# EAGLE board prototype (EAGLE 6.5.0)
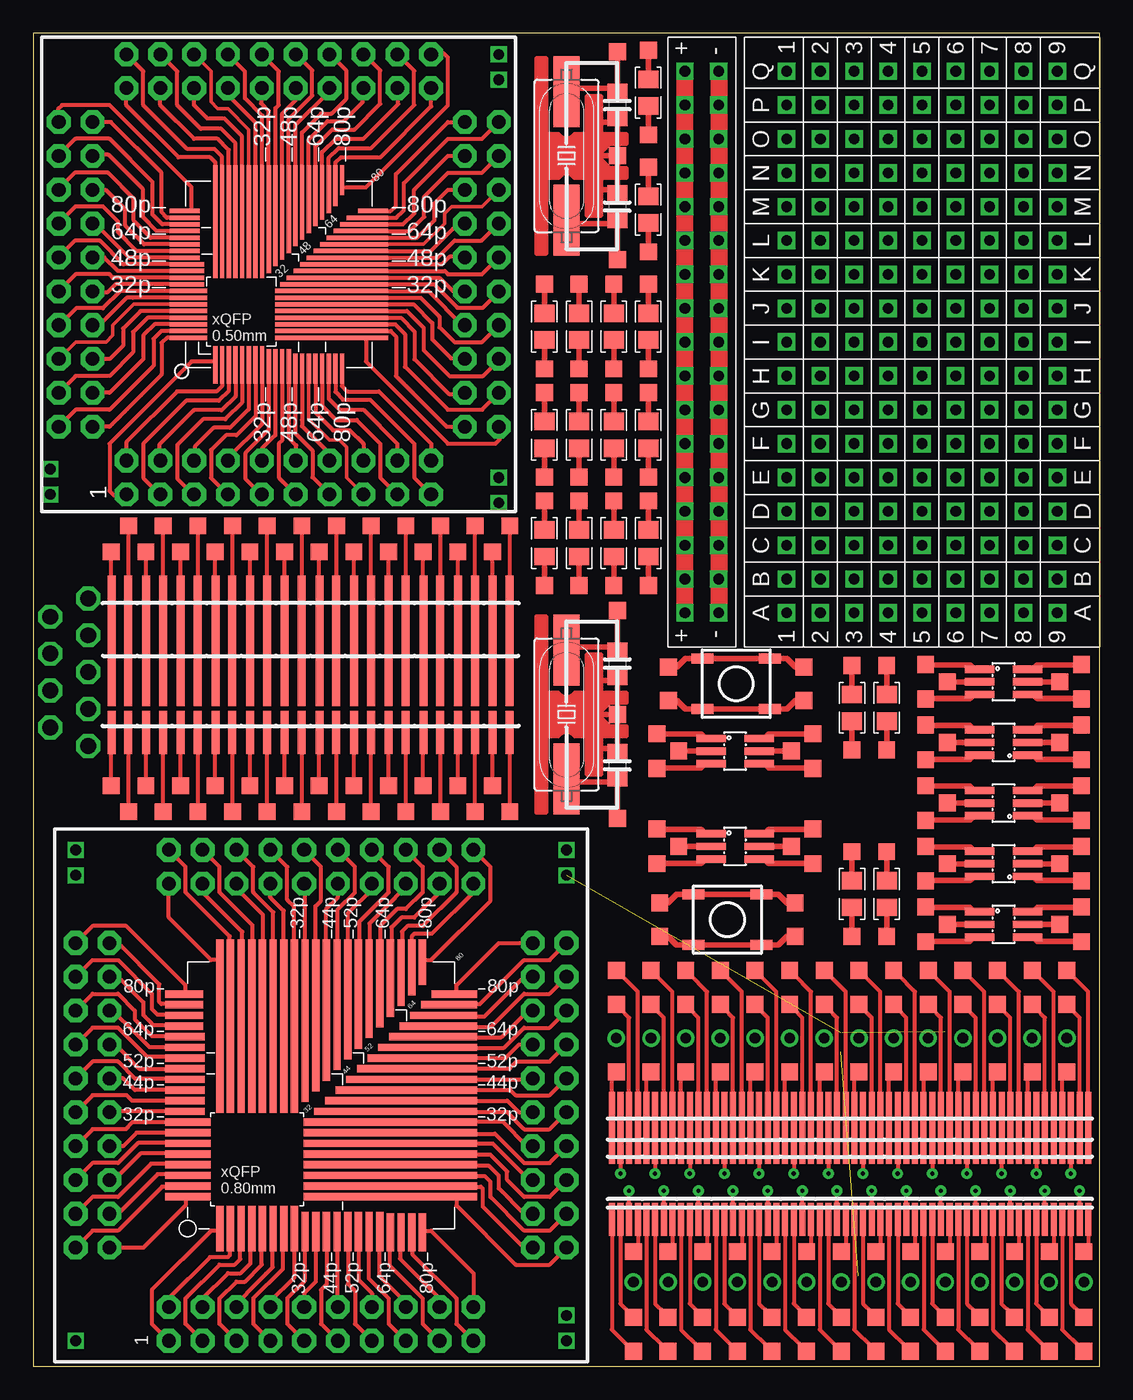
[diagram p0: board, top side]
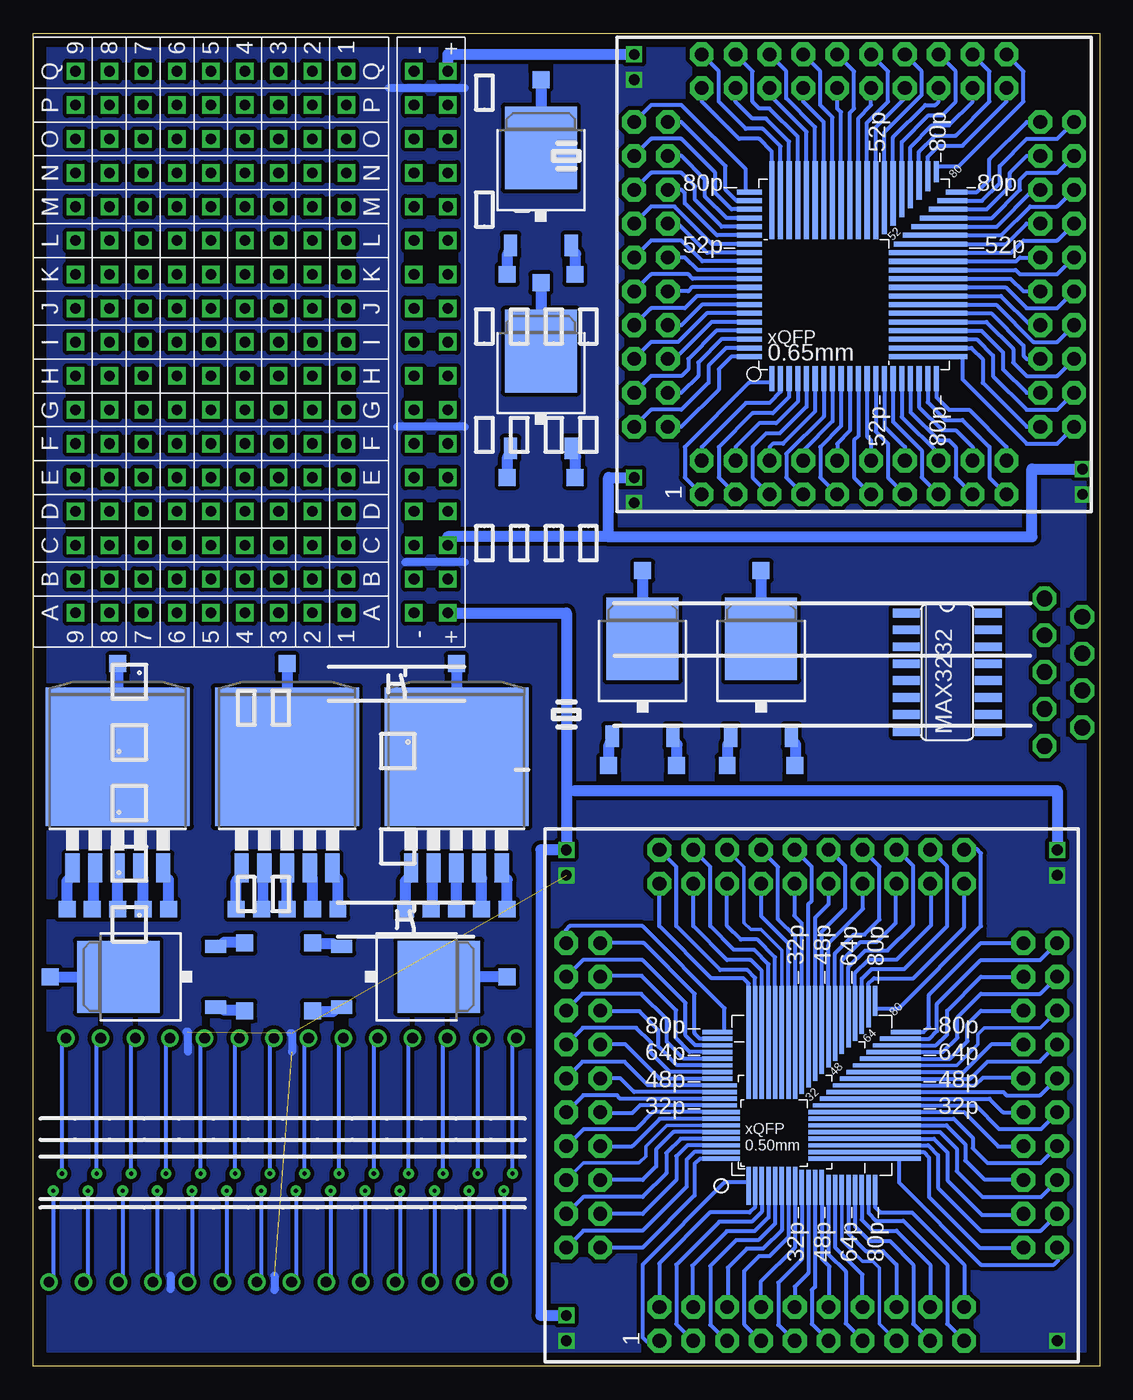
[diagram p1: board, bottom side, seen from below]

Size 80 x 100 mm. Coordinates in mm from the lower left corner, seen from the top.
Outline: 0,0 80,0 80,100 0,100 0,0
Copper layers (1*16): Top 0.035mm / dielectric 1.5mm / Bottom 0.035mm
Design rules "default *": minimum track width 0.2mm, minimum drill 0.4mm, track to track 8mil, track to pad 8mil, pad to pad 8mil, via to via 8mil, smd to smd 8mil, copper to edge 40mil, drill to drill 8mil, minimum pad ring 10mil, minimum via ring 4mil, stop-mask expansion 4mil, vias tented up to drill 0mil, thermal gap 10mil

## Footprints (pad centres in the part's own frame; a part is rotated, then mirrored left to right if it is on the bottom)
BB_TSSOP_0650 = smd 2.45 x 0.45: P$1 -3.425,0; P$2 -3.425,-0.65; P$7 -3.425,0.65; P$8 -3.425,1.3 | smd 5.4 x 0.45: P$3 3.425,1.3; P$4 3.425,-0.65; P$5 3.425,0; P$6 3.425,0.65 | smd 1.27 x 1.27: P$9 -13.335,-0.318; P$10 -10.795,-0.318; P$11 -5.85,-0.325; P$12 7.62,0.953; P$13 12.7,0.953; P$14 15.24,0.953 | drill 0.8: P$21 -8.125,-0.325; P$28 10.16,0.953 | drill 0.305: P$25 -1.285,0; P$26 0,0.65
BB_QFP_080_050_BREAKOUT_BOARD = smd 0.55 x 3.405: 1 -7.6,-9.998; 2 -6.8,-9.998; 3 -6,-9.998; 4 -5.2,-9.998; 5 -4.4,-9.998; 6 -3.6,-9.998; 7 -2.8,-9.998; 8 -2,-9.998; 41 7.6,9.997 | smd 0.55 x 2.95: 9 -1.2,-10.225; 10 -0.4,-10.225; 11 0.4,-10.225; 12 1.2,-10.225; 13 2,-10.225; 14 2.8,-10.225; 15 3.6,-10.225; 16 4.4,-10.225 | smd 0.55 x 2.85: 17 5.2,-10.275; 18 6,-10.275; 19 6.8,-10.275; 20 7.6,-10.275 | smd 13.005 x 0.55: 21 5.197,-7.6; 22 5.197,-6.8; 23 5.197,-6; 24 5.197,-5.2; 25 5.197,-4.4; 26 5.197,-3.6; 27 5.197,-2.8; 28 5.197,-2 | smd 12.205 x 0.55: 29 5.597,-1.2 | smd 11.405 x 0.55: 30 5.997,-0.4 | smd 10.605 x 0.55: 31 6.397,0.4 | smd 9.805 x 0.55: 32 6.797,1.2 | smd 9.005 x 0.55: 33 7.197,2 | smd 8.205 x 0.55: 34 7.597,2.8 | smd 7.405 x 0.55: 35 7.997,3.6 | smd 6.605 x 0.55: 36 8.397,4.4 | smd 5.805 x 0.55: 37 8.797,5.2 | smd 5.005 x 0.55: 38 9.197,6 | smd 4.205 x 0.55: 39 9.597,6.8 | smd 3.405 x 0.55: 40 9.997,7.6; 73 -9.998,-2; 74 -9.998,-2.8; 75 -9.998,-3.6; 76 -9.998,-4.4; 77 -9.998,-5.2; 78 -9.998,-6; 79 -9.998,-6.8; 80 -9.998,-7.6 | smd 0.55 x 4.205: 42 6.8,9.597 | smd 0.55 x 5.005: 43 6,9.197 | smd 0.55 x 5.805: 44 5.2,8.797 | smd 0.55 x 6.605: 45 4.4,8.397 | smd 0.55 x 7.405: 46 3.6,7.997 | smd 0.55 x 8.205: 47 2.8,7.597 | smd 0.55 x 9.005: 48 2,7.197 | smd 0.55 x 9.805: 49 1.2,6.797 | smd 0.55 x 10.605: 50 0.4,6.397 | smd 0.55 x 11.405: 51 -0.4,5.997 | smd 0.55 x 12.205: 52 -1.2,5.597 | smd 0.55 x 13.005: 53 -2,5.198; 54 -2.8,5.198; 55 -3.6,5.198; 56 -4.4,5.198; 57 -5.2,5.198; 58 -6,5.198; 59 -6.8,5.198; 60 -7.6,5.198 | smd 2.85 x 0.55: 61 -10.275,7.6; 62 -10.275,6.8; 63 -10.275,6; 64 -10.275,5.2 | smd 2.95 x 0.55: 65 -10.225,4.4; 66 -10.225,3.6; 67 -10.225,2.8; 68 -10.225,2; 69 -10.225,1.2; 70 -10.225,0.4; 71 -10.225,-0.4; 72 -10.225,-1.2 | smd 2.824 x 0.33 bottom: 81 6.788,-1.25; 82 6.788,-1.75; 83 6.788,-2.25; 84 6.788,-2.75; 85 6.788,-3.25; 86 6.788,-3.75; 87 6.788,-4.25; 88 6.788,-4.75 | smd 2.6 x 0.33 bottom: 89 6.9,-0.75; 90 6.9,-0.25; 91 6.9,0.25; 92 6.9,0.75 | smd 2.25 x 0.33 bottom: 93 7.075,1.25; 94 7.075,1.75; 95 7.075,2.75; 96 7.075,2.25; 117 7.075,3.25; 118 7.075,3.75; 119 7.075,4.25; 120 7.075,4.75; 160 -7.075,4.75 | smd 0.33 x 2.824 bottom: 97 4.75,-6.788; 98 4.25,-6.788; 99 3.75,-6.788; 100 3.25,-6.788; 101 2.75,-6.788; 102 2.25,-6.788; 103 1.75,-6.788; 104 1.25,-6.788 | smd 0.33 x 2.6 bottom: 105 0.75,-6.9; 106 0.25,-6.9; 107 -0.25,-6.9; 108 -0.75,-6.9 | smd 0.33 x 2.25 bottom: 109 -1.25,-7.075; 110 -1.75,-7.075; 111 -2.25,-7.075; 112 -2.75,-7.075; 113 -3.25,-7.075; 114 -3.75,-7.075; 115 -4.25,-7.075; 116 -4.75,-7.075; 159 -4.75,7.075 | smd 8.47 x 0.33 bottom: 121 -3.965,-4.75; 122 -3.965,-4.25; 123 -3.965,-3.75; 124 -3.965,-3.25; 125 -3.965,-2.75; 126 -3.965,-2.25; 127 -3.965,-1.75; 128 -3.965,-1.25 | smd 0.33 x 8.47 bottom: 129 4.75,3.965; 130 4.25,3.965; 131 3.75,3.965; 132 3.25,3.965; 133 2.75,3.965; 134 2.25,3.965; 135 1.75,3.965; 136 1.25,3.965 | smd 8.1 x 0.33 bottom: 137 -4.15,-0.75 | smd 0.33 x 8.1 bottom: 138 0.75,4.15 | smd 7.6 x 0.33 bottom: 139 -4.4,-0.25 | smd 0.33 x 7.6 bottom: 140 0.25,4.4 | smd 7.1 x 0.33 bottom: 141 -4.65,0.25 | smd 0.33 x 7.1 bottom: 142 -0.25,4.65 | smd 6.6 x 0.33 bottom: 143 -4.9,0.75 | smd 0.33 x 6.6 bottom: 144 -0.75,4.9 | smd 6.1 x 0.33 bottom: 145 -5.15,1.25 | smd 0.33 x 6.1 bottom: 146 -1.25,5.15 | smd 5.6 x 0.33 bottom: 147 -5.4,1.75 | smd 0.33 x 5.6 bottom: 148 -1.75,5.4 | smd 5.1 x 0.33 bottom: 149 -5.65,2.25 | smd 0.33 x 5.1 bottom: 150 -2.25,5.65 | smd 4.6 x 0.33 bottom: 151 -5.9,2.75 | smd 0.33 x 4.6 bottom: 152 -2.75,5.9 | smd 4.1 x 0.33 bottom: 153 -6.15,3.25 | smd 0.33 x 4.1 bottom: 154 -3.25,6.15 | smd 3.6 x 0.33 bottom: 155 -6.4,3.75 | smd 0.33 x 3.6 bottom: 156 -3.75,6.4 | smd 0.33 x 3.1 bottom: 157 -4.25,6.65 | smd 3.1 x 0.33 bottom: 158 -6.65,4.25 | drill 1.016 pad 1.778 octagon: P$1 -11.43,-18.415; P$2 -11.43,-15.875; P$3 -8.89,-18.415; P$4 -8.89,-15.875; P$5 -6.35,-18.415; P$6 -6.35,-15.875; P$7 -3.81,-18.415; P$8 -3.81,-15.875; P$9 -1.27,-18.415; P$10 -1.27,-15.875; P$11 1.27,-18.415; P$12 1.27,-15.875; P$13 3.81,-18.415; P$14 3.81,-15.875; P$15 6.35,-18.415; P$16 6.35,-15.875; P$17 8.89,-18.415; P$18 8.89,-15.875; P$19 11.43,-18.415; P$20 11.43,-15.875; P$21 18.415,-11.43; P$22 15.875,-11.43; P$23 18.415,-8.89; P$24 15.875,-8.89; P$25 18.415,-6.35; P$26 15.875,-6.35; P$27 18.415,-3.81; P$28 15.875,-3.81; P$29 18.415,-1.27; P$30 15.875,-1.27; P$31 18.415,1.27; P$32 15.875,1.27; P$33 18.415,3.81; P$34 15.875,3.81; P$35 18.415,6.35; P$36 15.875,6.35; P$37 18.415,8.89; P$38 15.875,8.89; P$39 18.415,11.43; P$40 15.875,11.43; P$41 11.43,18.415; P$42 11.43,15.875; P$43 8.89,18.415; P$44 8.89,15.875; P$45 6.35,18.415; P$46 6.35,15.875; P$47 3.81,18.415; P$48 3.81,15.875; P$49 1.27,18.415; P$50 1.27,15.875; P$51 -1.27,18.415; P$52 -1.27,15.875; P$53 -3.81,18.415; P$54 -3.81,15.875; P$55 -6.35,18.415; P$56 -6.35,15.875; P$57 -8.89,18.415; P$58 -8.89,15.875; P$59 -11.43,18.415; P$60 -11.43,15.875; P$61 -18.415,11.43; P$62 -15.875,11.43; P$63 -18.415,8.89; P$64 -15.875,8.89; P$65 -18.415,6.35; P$66 -15.875,6.35; P$67 -18.415,3.81; P$68 -15.875,3.81; P$69 -18.415,1.27; P$70 -15.875,1.27; P$71 -18.415,-1.27; P$72 -15.875,-1.27; P$73 -18.415,-3.81; P$74 -15.875,-3.81; P$75 -18.415,-6.35; P$76 -15.875,-6.35; P$77 -18.415,-8.89; P$78 -15.875,-8.89; P$79 -18.415,-11.43; P$80 -15.875,-11.43
BB_QFP_050_065_BREAKOUT_BOARD = smd 0.33 x 2.824: 1 -4.75,-6.788; 2 -4.25,-6.788; 3 -3.75,-6.788; 4 -3.25,-6.788; 5 -2.75,-6.788; 6 -2.25,-6.788; 7 -1.75,-6.788; 8 -1.25,-6.788 | smd 0.33 x 2.6: 9 -0.75,-6.9; 10 -0.25,-6.9; 11 0.25,-6.9; 12 0.75,-6.9 | smd 0.33 x 2.25: 13 1.25,-7.075; 14 1.75,-7.075; 15 2.25,-7.075; 16 2.75,-7.075; 17 3.25,-7.075; 18 3.75,-7.075; 19 4.25,-7.075; 20 4.75,-7.075; 41 4.75,7.075 | smd 8.47 x 0.33: 21 3.965,-4.75; 22 3.965,-4.25; 23 3.965,-3.75; 24 3.965,-3.25; 25 3.965,-2.75; 26 3.965,-2.25; 27 3.965,-1.75; 28 3.965,-1.25 | smd 8.1 x 0.33: 29 4.15,-0.75 | smd 7.6 x 0.33: 30 4.4,-0.25 | smd 7.1 x 0.33: 31 4.65,0.25 | smd 6.6 x 0.33: 32 4.9,0.75 | smd 6.1 x 0.33: 33 5.15,1.25 | smd 5.6 x 0.33: 34 5.4,1.75 | smd 5.1 x 0.33: 35 5.65,2.25 | smd 4.6 x 0.33: 36 5.9,2.75 | smd 4.1 x 0.33: 37 6.15,3.25 | smd 3.6 x 0.33: 38 6.4,3.75 | smd 3.1 x 0.33: 39 6.65,4.25 | smd 2.25 x 0.33: 40 7.075,4.75; 61 -7.075,4.75; 62 -7.075,4.25; 63 -7.075,3.75; 64 -7.075,3.25; 65 -7.075,2.75; 66 -7.075,2.25; 67 -7.075,1.75; 68 -7.075,1.25 | smd 0.33 x 3.1: 42 4.25,6.65 | smd 0.33 x 3.6: 43 3.75,6.4 | smd 0.33 x 4.1: 44 3.25,6.15 | smd 0.33 x 4.6: 45 2.75,5.9 | smd 0.33 x 5.1: 46 2.25,5.65 | smd 0.33 x 5.6: 47 1.75,5.4 | smd 0.33 x 6.1: 48 1.25,5.15 | smd 0.33 x 6.6: 49 0.75,4.9 | smd 0.33 x 7.1: 50 0.25,4.65 | smd 0.33 x 7.6: 51 -0.25,4.4 | smd 0.33 x 8.1: 52 -0.75,4.15 | smd 0.33 x 8.47: 53 -1.25,3.965; 54 -1.75,3.965; 55 -2.25,3.965; 56 -2.75,3.965; 57 -3.25,3.965; 58 -3.75,3.965; 59 -4.25,3.965; 60 -4.75,3.965 | smd 2.6 x 0.33: 69 -6.9,0.75; 70 -6.9,0.25; 71 -6.9,-0.25; 72 -6.9,-0.75 | smd 2.824 x 0.33: 73 -6.788,-1.25; 74 -6.788,-1.75; 75 -6.788,-2.25; 76 -6.788,-2.75; 77 -6.788,-3.25; 78 -6.788,-3.75; 79 -6.788,-4.25; 80 -6.788,-4.75 | smd 1.875 x 0.38 bottom: 81 7.838,-0.325; 82 7.838,0.325; 83 7.838,0.975; 84 7.838,1.625; 85 7.838,2.275; 86 7.838,2.925; 87 7.838,3.575; 88 7.838,4.225; 89 7.838,4.875; 90 7.838,5.525; 91 7.838,6.175; 92 7.838,-0.975; 93 7.838,-1.625; 94 7.838,-2.275; 95 7.838,-2.925; 96 7.838,-3.575; 97 7.838,-4.225; 98 7.838,-4.875; 99 7.838,-5.525; 100 7.838,-6.175 | smd 0.38 x 1.875 bottom: 101 6.175,-7.838; 102 5.525,-7.838; 103 4.875,-7.838; 104 4.225,-7.838; 105 3.575,-7.838; 106 2.925,-7.838; 107 2.275,-7.838; 108 1.625,-7.838; 109 0.975,-7.838; 110 0.325,-7.838; 111 -0.325,-7.838; 112 -0.975,-7.838; 113 -1.625,-7.838; 114 -2.275,-7.838; 115 -2.925,-7.838; 116 -3.575,-7.838; 117 -4.225,-7.838; 118 -4.875,-7.838; 119 -5.525,-7.838; 120 -6.175,-7.838 | smd 1.6 x 0.38 bottom: 121 -7.7,6.175 | smd 0.38 x 1.6 bottom: 122 -6.175,7.7 | smd 0.38 x 2.25 bottom: 123 -5.525,7.375 | smd 0.38 x 5.875 bottom: 124 1.625,5.563; 125 0.975,5.563; 126 0.325,5.563; 127 -0.325,5.563; 128 -0.975,5.563; 129 -1.625,5.563; 135 2.275,5.563; 136 2.925,5.563; 137 3.575,5.563; 138 4.225,5.563; 139 4.875,5.563; 140 5.525,5.563; 141 6.175,5.563 | smd 0.38 x 5.5 bottom: 130 -2.275,5.75 | smd 0.38 x 4.85 bottom: 131 -2.925,6.075 | smd 0.38 x 4.2 bottom: 132 -3.575,6.4 | smd 0.38 x 3.55 bottom: 133 -4.225,6.725 | smd 0.38 x 2.9 bottom: 134 -4.875,7.05 | smd 5.875 x 0.38 bottom: 142 -5.563,-6.175; 143 -5.563,-5.525; 144 -5.563,-4.875; 145 -5.563,-4.225; 146 -5.563,-3.575; 147 -5.563,-2.925; 148 -5.563,-2.275; 149 -5.563,-1.625; 156 -5.563,1.625; 157 -5.563,0.975; 158 -5.563,0.325; 159 -5.563,-0.325; 160 -5.563,-0.975 | smd 2.25 x 0.38 bottom: 150 -7.375,5.525 | smd 2.9 x 0.38 bottom: 151 -7.05,4.875 | smd 3.55 x 0.38 bottom: 152 -6.725,4.225 | smd 4.2 x 0.38 bottom: 153 -6.4,3.575 | smd 4.85 x 0.38 bottom: 154 -6.075,2.925 | smd 5.5 x 0.38 bottom: 155 -5.75,2.275 | drill 1.016 pad 1.778 octagon: P$1 -11.43,-16.51; P$2 -11.43,-13.97; P$3 -8.89,-16.51; P$4 -8.89,-13.97; P$5 -6.35,-16.51; P$6 -6.35,-13.97; P$7 -3.81,-16.51; P$8 -3.81,-13.97; P$9 -1.27,-16.51; P$10 -1.27,-13.97; P$11 1.27,-16.51; P$12 1.27,-13.97; P$13 3.81,-16.51; P$14 3.81,-13.97; P$15 6.35,-16.51; P$16 6.35,-13.97; P$17 8.89,-16.51; P$18 8.89,-13.97; P$19 11.43,-16.51; P$20 11.43,-13.97; P$21 16.51,-11.43; P$22 13.97,-11.43; P$23 16.51,-8.89; P$24 13.97,-8.89; P$25 16.51,-6.35; P$26 13.97,-6.35; P$27 16.51,-3.81; P$28 13.97,-3.81; P$29 16.51,-1.27; P$30 13.97,-1.27; P$31 16.51,1.27; P$32 13.97,1.27; P$33 16.51,3.81; P$34 13.97,3.81; P$35 16.51,6.35; P$36 13.97,6.35; P$37 16.51,8.89; P$38 13.97,8.89; P$39 16.51,11.43; P$40 13.97,11.43; P$41 11.43,16.51; P$42 11.43,13.97; P$43 8.89,16.51; P$44 8.89,13.97; P$45 6.35,16.51; P$46 6.35,13.97; P$47 3.81,16.51; P$48 3.81,13.97; P$49 1.27,16.51; P$50 1.27,13.97; P$51 -1.27,16.51; P$52 -1.27,13.97; P$53 -3.81,16.51; P$54 -3.81,13.97; P$55 -6.35,16.51; P$56 -6.35,13.97; P$57 -8.89,16.51; P$58 -8.89,13.97; P$59 -11.43,16.51; P$60 -11.43,13.97; P$61 -16.51,11.43; P$62 -13.97,11.43; P$63 -16.51,8.89; P$64 -13.97,8.89; P$65 -16.51,6.35; P$66 -13.97,6.35; P$67 -16.51,3.81; P$68 -13.97,3.81; P$69 -16.51,1.27; P$70 -13.97,1.27; P$71 -16.51,-1.27; P$72 -13.97,-1.27; P$73 -16.51,-3.81; P$74 -13.97,-3.81; P$75 -16.51,-6.35; P$76 -13.97,-6.35; P$77 -16.51,-8.89; P$78 -13.97,-8.89; P$79 -16.51,-11.43; P$80 -13.97,-11.43
BB_SOIC = smd 3.2 x 0.6: P$1 -5.11,0.635; P$2 -5.11,-0.635 | smd 9.8 x 0.6: P$3 1.77,-0.635; P$4 1.77,0.635 | smd 1.27 x 1.27: P$5 -9.1,0.65; P$6 -11.05,-0.65; P$7 8.45,0.65; P$8 10.4,-0.65
BB_SOT23-6 = smd 0.55 x 2.2: 1 -0.95,-1.8; 2 0,-1.8; 3 0.95,-1.8; 4 0.95,1.8; 5 0,1.8; 6 -0.95,1.8 | smd 1.27 x 1.27: P$1 -1.3,5.85; P$2 1.3,5.85; P$3 0,4.225; P$4 0,-4.225; P$5 -1.3,-5.85; P$6 1.3,-5.85
BB_XTAL = smd 5.334 x 1.93: 1 -4.826,-2.54; 2 4.826,-2.54 | smd 1.3 x 1.5: 3 -4.76,1.27; 4 -2.86,1.27; 5 2.86,1.27; 6 4.76,1.27 | smd 1.27 x 1.27: P$1 -7.8,1.3; P$2 7.8,1.3; P$3 0,1.3
PROTO_THROUGH = drill 0.8 square: P$1 12.7,0; P$2 10.16,0; P$3 7.62,0; P$4 5.08,0; P$5 15.24,0; P$6 17.78,0; P$7 20.32,0; P$8 2.54,0; P$9 -2.54,0; P$10 0,0; P$11 0,-2.54; P$12 0,-5.08; P$13 0,-7.62; P$14 0,-10.16; P$15 0,2.54; P$16 0,5.08; P$17 0,7.62; P$18 0,10.16; P$19 2.54,10.16; P$20 5.08,10.16; P$21 7.62,10.16; P$22 10.16,10.16; P$23 12.7,10.16; P$24 15.24,10.16; P$25 17.78,10.16; P$26 20.32,10.16; P$27 -5.08,0; P$28 -7.62,0; P$29 -10.16,0; P$30 -10.16,-2.54; P$31 -10.16,-5.08; P$32 -10.16,-7.62; P$33 2.54,-10.16; P$34 5.08,-10.16; P$35 7.62,-10.16; P$36 10.16,-10.16; P$37 12.7,-10.16; P$38 15.24,-10.16; P$39 17.78,-10.16; P$40 20.32,-10.16; P$41 -10.16,-10.16; P$42 -10.16,2.54; P$43 20.32,-7.62; P$44 20.32,-5.08; P$45 20.32,-2.54; P$46 17.78,-2.54; P$47 15.24,-2.54; P$48 12.7,-2.54; P$49 10.16,-2.54; P$50 7.62,-2.54; P$51 5.08,-2.54; P$52 2.54,-2.54; P$53 2.54,-5.08; P$54 2.54,-7.62; P$55 5.08,-7.62; P$56 5.08,-5.08; P$57 7.62,-5.08; P$58 7.62,-7.62; P$59 10.16,-7.62; P$60 10.16,-5.08; P$61 12.7,-5.08; P$62 15.24,-5.08; P$63 17.78,-5.08; P$64 17.78,-7.62; P$65 15.24,-7.62; P$66 12.7,-7.62; P$67 2.54,2.54; P$68 5.08,2.54; P$69 7.62,2.54; P$70 10.16,2.54; P$71 12.7,2.54; P$72 15.24,2.54; P$73 17.78,2.54; P$74 20.32,2.54; P$75 20.32,5.08; P$76 17.78,5.08; P$77 17.78,7.62; P$78 20.32,7.62; P$79 15.24,7.62; P$80 15.24,5.08; P$81 12.7,5.08; P$82 12.7,7.62; P$83 10.16,7.62; P$84 10.16,5.08; P$85 7.62,5.08; P$86 5.08,5.08; P$87 2.54,5.08; P$88 2.54,7.62; P$89 5.08,7.62; P$90 7.62,7.62; P$91 -10.16,5.08; P$92 -10.16,7.62; P$93 -10.16,10.16; P$94 -7.62,10.16; P$95 -5.08,10.16; P$96 -2.54,10.16; P$97 -7.62,-10.16; P$98 -5.08,-10.16; P$99 -2.54,-10.16; P$100 -2.54,-2.54; P$101 -5.08,-2.54; P$102 -7.62,-2.54; P$103 -7.62,-5.08; P$104 -7.62,-7.62; P$105 -5.08,-7.62; P$106 -5.08,-5.08; P$107 -2.54,-5.08; P$108 -2.54,-7.62; P$109 -7.62,2.54; P$110 -5.08,2.54; P$111 -2.54,2.54; P$112 -2.54,5.08; P$113 -5.08,5.08; P$114 -7.62,5.08; P$115 -7.62,7.62; P$116 -5.08,7.62; P$117 -2.54,7.62; P$118 -12.7,0; P$119 -15.24,0; P$120 -17.78,0; P$121 -20.32,0; P$122 -20.32,-2.54; P$123 -20.32,-5.08; P$124 -20.32,-7.62; P$125 -20.32,-10.16; P$126 -20.32,2.54; P$127 -20.32,5.08; P$128 -20.32,7.62; P$129 -20.32,10.16; P$130 -17.78,10.16; P$131 -15.24,10.16; P$132 -12.7,10.16; P$133 -17.78,-10.16; P$134 -15.24,-10.16; P$135 -12.7,-10.16; P$136 -12.7,-2.54; P$137 -15.24,-2.54; P$138 -17.78,-2.54; P$139 -17.78,-5.08; P$140 -17.78,-7.62; P$141 -15.24,-7.62; P$142 -15.24,-5.08; P$143 -12.7,-5.08; P$144 -12.7,-7.62; P$145 -17.78,2.54; P$146 -15.24,2.54; P$147 -12.7,2.54; P$148 -12.7,5.08; P$149 -15.24,5.08; P$150 -17.78,5.08; P$151 -17.78,7.62; P$152 -15.24,7.62; P$153 -12.7,7.62
VCC_GND = drill 0.8 square: P$1 -11.43,2.54; P$2 -8.89,2.54; P$3 -6.35,2.54; P$4 -3.81,2.54; P$5 -1.27,2.54; P$6 1.27,2.54; P$7 3.81,2.54; P$8 6.35,2.54; P$9 8.89,2.54; P$10 11.43,2.54; P$11 -11.43,0; P$12 -8.89,0; P$13 -6.35,0; P$14 -3.81,0; P$15 -1.27,0; P$16 1.27,0; P$17 3.81,0; P$18 6.35,0; P$19 8.89,0; P$20 11.43,0; P$21 13.97,2.54; P$22 13.97,0; P$23 -13.97,0; P$24 -13.97,2.54; P$25 -16.51,2.54; P$26 -16.51,0; P$27 16.51,0; P$28 16.51,2.54; P$29 -19.05,2.54; P$30 -19.05,0; P$31 19.05,0; P$32 19.05,2.54; P$33 21.59,2.54; P$34 21.59,0
SUBD9 = drill 1.194 pad 1.524 octagon: 1 -5.537,-1.585; 2 -2.769,-1.585; 3 0,-1.585; 4 2.769,-1.585; 5 5.537,-1.585; 6 -4.153,1.258; 7 -1.384,1.258; 8 1.384,1.258; 9 4.153,1.258
BB_SW = smd 1.651 x 0.762: 1 -2.54,1.905; 2 2.54,1.905; 3 -2.54,-1.905; 4 2.54,-1.905 | smd 1.27 x 1.27: P$1 -5.08,1.27; P$2 -5.08,-1.27; P$3 5.08,-1.27; P$4 5.08,1.27
TO-263 = smd 1.067 x 2.159: 1 -3.404,-4.521; 2 -1.702,-4.521; 3 0,-4.521; 4 1.702,-4.521; 5 3.404,-4.521 | smd 10.8 x 10.41: 6 0,3.81 | smd 1.27 x 1.27: P$1 0,10.795; P$2 -3.81,-7.62; P$3 -1.905,-7.62; P$4 0,-7.62; P$5 1.905,-7.62; P$6 3.81,-7.62
TO-252 = smd 1 x 1.6: 1 -2.28,-2.26; 2 2.28,-2.26 | smd 5.4 x 6.2: 3 0,5.04 | smd 1.27 x 1.27: P$1 -2.54,-4.445; P$2 2.54,-4.445; P$3 0,10.16
BB_RC0805 = smd 1.3 x 1.5: P$1 -1,0; P$2 1,0 | smd 1.27 x 1.27: P$3 -3.175,0; P$4 3.175,0
SO16 = smd 0.66 x 2.032: 1 -4.445,-3.073; 2 -3.175,-3.073; 3 -1.905,-3.073; 4 -0.635,-3.073; 5 0.635,-3.073; 6 1.905,-3.073; 7 3.175,-3.073; 8 4.445,-3.073; 9 4.445,3.073; 10 3.175,3.073; 11 1.905,3.073; 12 0.635,3.073; 13 -0.635,3.073; 14 -1.905,3.073; 15 -3.175,3.073; 16 -4.445,3.073

## Placement (x,y rotation side)
E$1  [BB_TSSOP_0650]  68.1,14.45 90 top
E$2  [BB_TSSOP_0650]  70.7,14.45 90 top
E$3  [BB_TSSOP_0650]  65.5,14.45 90 top
E$4  [BB_TSSOP_0650]  62.9,14.45 90 top
E$5  [BB_TSSOP_0650]  60.3,14.45 90 top
E$6  [BB_TSSOP_0650]  57.7,14.45 90 top
E$7  [BB_TSSOP_0650]  55.1,14.45 90 top
E$8  [BB_TSSOP_0650]  52.5,14.45 90 top
E$9  [BB_TSSOP_0650]  49.9,14.45 90 top
E$10  [BB_TSSOP_0650]  47.3,14.45 90 top
E$11  [BB_QFP_080_050_BREAKOUT_BOARD]  21.59,20.32 0 top
E$12  [BB_TSSOP_0650]  73.3,14.45 90 top
E$13  [BB_TSSOP_0650]  75.9,14.45 90 top
E$14  [BB_TSSOP_0650]  78.5,14.45 90 top
E$15  [BB_QFP_050_065_BREAKOUT_BOARD]  18.41,81.92 0 top
E$16  [BB_SOIC]  6.5,52.65 90 top
E$17  [BB_SOIC]  9.1,52.65 90 top
E$18  [BB_SOIC]  11.7,52.65 90 top
E$19  [BB_SOIC]  14.3,52.65 90 top
E$20  [BB_SOIC]  16.9,52.65 90 top
E$21  [BB_SOIC]  19.5,52.65 90 top
E$22  [BB_SOIC]  22.1,52.65 90 top
E$23  [BB_SOIC]  24.7,52.65 90 top
E$24  [BB_SOIC]  27.3,52.65 90 top
E$25  [BB_SOIC]  29.9,52.65 90 top
E$26  [BB_SOIC]  32.5,52.65 90 top
E$27  [BB_SOIC]  35.1,52.65 90 top
E$28  [BB_SOT23-6]  52.65,39 270 top
E$29  [BB_XTAL]  42.55,90.81 270 top
E$30  [PROTO_THROUGH]  66.67,76.83 90 top
E$31  [BB_SOT23-6]  52.65,46.15 270 top
E$32  [VCC_GND]  51.44,75.56 90 top
E$33  [SUBD9]  2.54,52.07 90 top
E$34  [BB_SW]  52.73,51.2 0 top
E$35  [BB_XTAL]  42.55,48.9 270 top
E$36  [BB_TSSOP_0650]  44.7,14.45 90 top
E$37  [TO-263]  48.26,41.91 0 bottom
E$38  [TO-263]  60.96,41.91 0 bottom
E$39  [TO-263]  73.66,41.91 0 bottom
E$40  [TO-252]  41.91,86.36 0 bottom
E$41  [TO-252]  68.58,29.21 90 bottom
E$42  [TO-252]  54.61,29.21 270 bottom
E$43  [TO-252]  41.91,71.12 0 bottom
E$44  [TO-252]  34.29,49.53 0 bottom
E$45  [TO-252]  25.4,49.53 0 bottom
E$54  [BB_RC0805]  43.55,69.88 90 top
E$55  [BB_RC0805]  46.15,61.75 90 top
E$56  [BB_RC0805]  43.55,61.75 90 top
E$57  [BB_RC0805]  64.03,49.4 90 top
E$58  [BB_RC0805]  61.42,49.4 90 top
E$59  [BB_RC0805]  64.03,35.42 90 top
E$60  [BB_RC0805]  46.15,95.55 90 top
E$61  [BB_RC0805]  40.95,78 90 top
E$195  [BB_RC0805]  38.35,69.88 90 top
E$196  [BB_RC0805]  38.35,61.75 90 top
E$203  [BB_RC0805]  40.95,61.75 90 top
E$213  [BB_RC0805]  38.35,78 90 top
E$214  [BB_RC0805]  43.55,78 90 top
E$215  [BB_RC0805]  46.15,78 90 top
E$218  [BB_RC0805]  40.95,69.88 90 top
E$219  [BB_RC0805]  46.15,86.78 90 top
E$220  [BB_RC0805]  46.15,69.88 90 top
E$250  [BB_SOT23-6]  72.8,33.15 270 top
E$251  [BB_SOT23-6]  72.8,42.25 90 top
E$252  [BB_SOT23-6]  72.8,51.35 270 top
E$254  [BB_SOT23-6]  72.8,46.8 90 top
E$255  [BB_SOT23-6]  72.8,37.7 90 top
E$260  [BB_SW]  52.08,33.5 0 top
E$519  [BB_RC0805]  61.42,35.42 90 top
MAX3232  [SO16]  11.43,52.07 270 bottom

## Library data of the parts
E$1-E$14 E$16-E$45 E$54-E$61 E$195 E$196 E$203 E$213-E$215 E$218-E$220 E$250-E$252 E$254 E$255 E$260 E$519 = 80_50
E$15 = 50_65
MAX3232 = maxim

## Nets
S$14: E$32.P$24

## Tracks (layer width: path | path; a pad name or v marks a point on that pad's centre or on a via)
GND  (via drill 0.8)  (4 unrouted)
  Bottom 0.61: 47.62,95.89 53.34,95.89 | 47.62,60.33 52.07,60.33 | 47.62,70.48 52.7,70.48 | 60.7,25 60.6,25 60.6,23.6 | 61.9,6.8 61.9,5.7 | 68.5,25.1 68.4,25.1 68.4,23.6 | 69.7,6.8 69.7,5.8
  other vias: 34.92,64.77 34.92,96.52 1.27,65.41 3.17,36.83 40.01,36.83 40.01,1.91 3.17,1.91
  pour Bottom (isolate 0.305): -0.64,100.97 80.64,100.97 80.64,-0.64 -0.64,-0.64
S$5  (via drill 0.8)
  Bottom 0.813: 48.9,56.52 40.01,56.52 v40.01,38.73 41.91,38.73 41.91,3.81 v40.01,3.81
S$11  (via drill 0.8)
  Bottom 0.813: 39.37,43.18 3.17,43.18 v3.17,38.73
S$13  (via drill 0.8)
  Bottom 0.813: 48.9,97.16 48.9,98.42 v34.92,98.42
S$14  (via drill 0.8)
  Bottom 0.813: 36.83,62.23 5.08,62.23 5.08,67.31 v1.27,67.31 | v34.92,66.67 36.83,66.67 36.83,62.23 | 36.83,62.23 48.9,62.23 E$32.P$24